# EAGLE board ATTiny-A4950 (EAGLE 6.4)
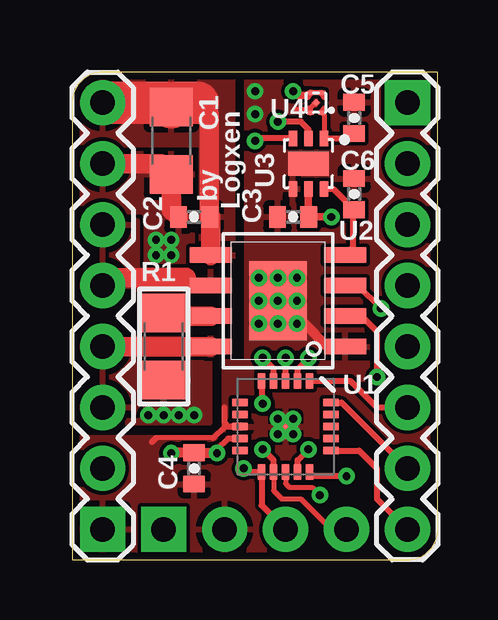
[diagram p0: board, top side]
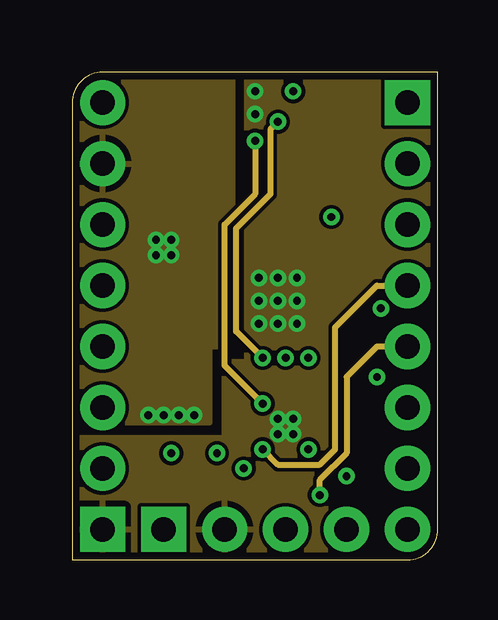
[diagram p1: board, inner layer Route2]
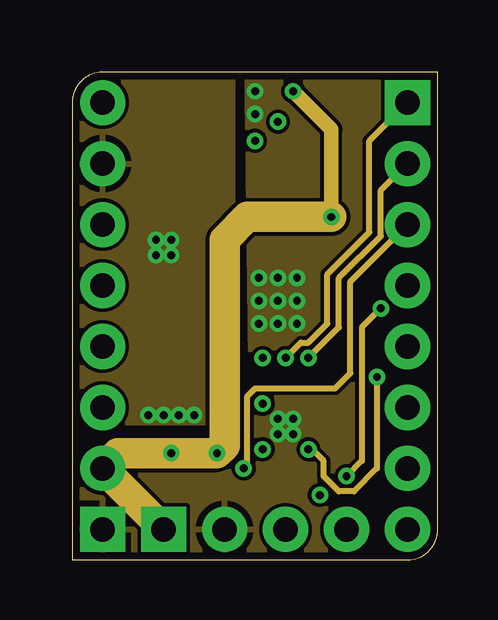
[diagram p2: board, inner layer Route15]
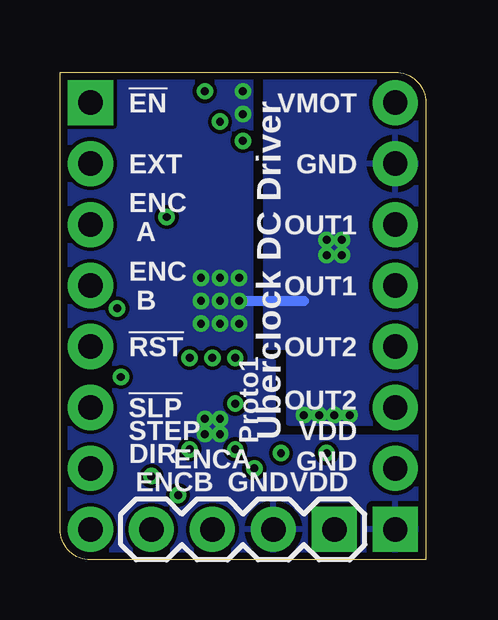
[diagram p3: board, bottom side, seen from below]

Size 15.24 x 20.32 mm. Coordinates in mm from the lower left corner, seen from the top.
Outline: 0,0 13.97,0 arc90 15.24,1.27 15.24,20.32 1.27,20.32 arc90 0,19.05 0,0
Copper layers (1*2*15*16): Top 0.0356mm / dielectric 0.5mm / Route2 0.0356mm / dielectric 0.5mm / Route15 0.0356mm / dielectric 0.5mm / Bottom 0.0356mm
Design rules "LaenPCBOrder *": minimum track width 6mil, minimum drill 13mil, track to track 6mil, track to pad 6mil, pad to pad 6mil, via to via 6mil, smd to smd 6mil, copper to edge 12mil, drill to drill 6mil, minimum pad ring 7mil, minimum via ring 7mil, stop-mask expansion 4mil, vias tented up to drill 13mil, thermal gap 10mil

## Footprints (pad centres in the part's own frame; a part is rotated, then mirrored left to right if it is on the bottom)
1206 = smd 1.6 x 1.8: 1 -1.4,0; 2 1.4,0
0402-CAP = smd 0.7 x 0.9: 1 -0.65,0; 2 0.65,0
1X08 = drill 1.016 pad 1.88 square: 1 0,0 | drill 1.016 pad 1.88: 2 2.54,0; 3 5.08,0; 4 7.62,0; 5 10.16,0; 6 12.7,0; 7 15.24,0; 8 17.78,0
1X04 = drill 1.016 pad 1.88 square: 1 0,0 | drill 1.016 pad 1.88: 2 2.54,0; 3 5.08,0; 4 7.62,0
QFN20 = smd 1 x 1: 0 0,0 | smd 0.65 x 0.3: 1 -1.9,1; 2 -1.9,0.5; 3 -1.9,0; 4 -1.9,-0.5; 5 -1.9,-1; 11 1.9,-1; 12 1.9,-0.5; 13 1.9,0; 14 1.9,0.5; 15 1.9,1 | smd 0.3 x 0.65: 6 -1,-1.9; 7 -0.5,-1.9; 8 0,-1.9; 9 0.5,-1.9; 10 1,-1.9; 16 1,1.9; 17 0.5,1.9; 18 0,1.9; 19 -0.5,1.9; 20 -1,1.9
SOICN8-PAD = smd 0.65 x 1.75: 1 -1.905,-2.8; 2 -0.635,-2.8; 3 0.635,-2.8; 4 1.905,-2.8; 5 1.905,2.8; 6 0.635,2.8; 7 -0.635,2.8; 8 -1.905,2.8 | smd 3.3 x 2.41: PAD 0,0
6DFN = smd 0.35 x 0.65: 1 -0.65,-1.05; 2 0,-1.05; 3 0.65,-1.05; 4 0.65,1.05; 5 0,1.05; 6 -0.65,1.05 | smd 1.7 x 1: PAD 0,0
XDFN4 = smd 0.27 x 0.17: 1 -0.24,0.415; 2 0.24,0.415; 3 0.24,-0.415; 4 -0.24,-0.415 | smd 0.22 x 0.22 rotated 45: TAB 0,0

## Placement (x,y rotation side)
C1  4.7uF  [1206]  4.13,17.46 270 top
C2  0.22uF X5R  [0402-CAP]  5.08,14.29 180 top
C3  0.1uF  [0402-CAP]  9.21,14.29 0 top
C4  0.1uF  [0402-CAP]  5.08,3.81 270 top
C5  0.1uF  [0402-CAP]  11.75,18.41 90 top
C6  0.1uF  [0402-CAP]  11.75,15.24 90 top
JP1  [1X08]  13.97,19.05 270 top
JP2  [1X08]  1.27,1.27 90 top
JP3  Encoder  [1X04]  3.81,1.27 180 bottom
R1  R050 1W  [1206]  3.81,8.89 90 top
U1  ATTINY84A-MU  [QFN20]  8.89,5.56 270 top
U2  A4950  [SOICN8-PAD]  8.57,10.79 90 top
U3  MCP4706  [6DFN]  9.84,16.51 180 top
U4  NCP4680  [XDFN4]  10.16,19.05 180 top

## Library data of the parts
C1-C6 = SparkFun-Capacitors
JP1-JP3 = SparkFun-Connectors
R1 = microbuilder
U1 = SparkFun-DigitalIC
U2-U4 = logxen

## Nets
!EN!: JP1.1 U1.3
!RST!: JP1.5 U1.13
!SLP!: JP1.6 U1.1
D0_IN1: U1.15 U2.3
D0_IN2: U1.14 U2.2
D0_LSS: R1.2 U2.7
D0_OUT1: JP2.5 JP2.6 U2.6
D0_OUT2: JP2.3 JP2.4 U2.8
DAC_REF: C5.1 U3.1 U4.1
DAC_SCL: U1.4 U3.2
DAC_SDA: U1.5 U3.3
DIR: JP1.8 U1.16
ENC0: JP1.3 JP3.3 U1.11
ENC1: JP1.4 JP3.4 U1.12
EXT: JP1.2 U1.2
GND: C1.2 C2.2 C3.1 C4.2 C5.2 C6.2 JP2.1 JP2.7 JP3.2 R1.1 U1.0 U1.8 U2.1 U2.PAD U3.4 U3.PAD U4.2 U4.TAB
STEP: JP1.7 U1.20
VDD: C3.2 C4.1 JP2.2 JP3.1 U1.9 U3.5 U4.3 U4.4
VMOT: C1.1 C2.1 JP2.8 U2.5
VREF: C6.1 U2.4 U3.6

## Tracks (layer width: path | path; a pad name or v marks a point on that pad's centre or on a via)
!EN!  (via drill 0.33)
  Top 0.254: U1.3 v8.89,8.41
  Route15 0.254: v8.89,8.41 9.53,9.05 9.84,9.05 10.64,9.84 10.64,11.91 12.38,13.65 12.38,17.46 JP1.1
!RST!  (via drill 0.33)
  Top 0.203: U1.13 8.89,3.17 9.05,3.02 10,3.02 v10.32,2.7
  Route2 0.254: JP1.5 12.7,8.89 11.43,7.62 11.43,4.45 10.32,3.33 v10.32,2.7
!SLP!
  Top 0.254: U1.1 11.59,7.46 12.7,6.35 JP1.6
D0_IN1  (via drill 0.33)
  Top 0.254: U2.3 11.91,11.43 v12.86,10.48 | v11.43,3.49 10.05,3.49 U1.15
  Route15 0.254: v12.86,10.48 12.06,9.68 12.06,4.13 v11.43,3.49
D0_IN2  (via drill 0.33)
  Top 0.254: U2.2 12.06,10.16 12.7,9.53 v12.7,7.62 | U1.14 9.39,4.15 v9.84,4.6
  Route15 0.254: v12.7,7.62 12.7,3.81 11.75,2.86 11.11,2.86 10.48,3.49 10.48,4.13 10,4.6 v9.84,4.6
D0_LSS
  Top 0.813: U2.7 3.94,10.16 R1.2
D0_OUT1
  Top 0.61: U2.6 5.08,11.43 4.76,11.75
  Top 0.813: 4.76,11.75 1.59,11.75 JP2.5
  pour Top (isolate 0.127, rank 2): -1.27,14.13 2.7,14.13 2.7,12.06 6.35,12.06 6.35,11.27 -1.27,11.27
D0_OUT2
  Top 0.813: U2.8 JP2.4
  pour Top (rank 2): -1.27,6.19 2.7,6.19 2.7,8.57 6.35,8.57 6.35,9.21 -1.27,9.21
DAC_REF
  Top 0.203: U4.1 10.49,18.54 U3.1
  Top 0.254: U3.1 11.54,17.56 C5.1
DAC_SCL  (via drill 0.33)
  Top 0.254: U1.4 8.39,7.96 v7.94,8.41 | U3.2 9.84,17.94 9.53,18.26 v8.57,18.26
  Route2 0.254: v8.57,18.26 8.26,17.94 8.26,15.24 6.83,13.81 6.83,9.53 v7.94,8.41
DAC_SDA  (via drill 0.33)
  Top 0.254: U1.5 7.89,6.56 v7.94,6.51 | U3.3 7.72,17.56 v7.62,17.46
  Route2 0.254: v7.62,17.46 7.62,15.24 6.35,13.97 6.35,8.1 v7.94,6.51
DIR
  Top 0.254: U1.16 11.95,4.56 12.7,3.81 12.7,2.54 JP1.8
ENC0  (via drill 0.33)
  Top 0.254: JP3.3 7.89,2.27 U1.11 7.3,3.66 v7.14,3.81
  Route15 0.254: v7.14,3.81 7.3,3.97 7.3,6.83 7.62,7.14 10.95,7.14 11.59,7.78 11.59,11.59 JP1.3
ENC1  (via drill 0.33)
  Top 0.203: U1.12 8.39,2.88 8.73,2.54 9.53,2.54 10.79,1.27 JP3.4
  Top 0.254: U1.12 8.39,4.15 v7.94,4.6
  Route2 0.254: v7.94,4.6 8.57,3.97 10.32,3.97 10.95,4.6 10.95,9.68 12.7,11.43 JP1.4
EXT  (via drill 0.33)
  Top 0.254: U1.2 9.39,7.96 v9.84,8.41
  Route15 0.254: v9.84,8.41 11.11,9.68 11.11,11.75 12.86,13.49 12.86,15.4 JP1.2
GND  (via drill 0.33)
  Top 0.203: 5.87,5.08 3.49,5.08 | U4.TAB 9.92,18.81 U4.2
  Top 0.254: U4.2 9.92,18.66 9.84,18.73 9.37,18.73 | 6.51,5.56 6.35,5.71 6.35,6.35 | U1.8 6.51,5.56 | 6.51,5.56 6.35,5.56 5.87,5.08 | 3.49,5.08 3.33,4.92
  Top 0.406: U2.1 10.64,8.89 9.68,9.84 v9.37,9.84
  Top 0.813: JP2.7 3.68,16.51 C1.2 4.13,14.59 C2.2
  Bottom 0.406: v7.78,10.79 5.08,10.79
  other vias: 3.81,6.03 4.45,6.03 5.08,6.03 9.21,5.87 8.57,5.87 8.57,5.24 9.21,5.24 8.57,10.79 9.37,10.79 9.37,11.75 8.57,11.75 7.78,11.75 7.78,9.84 8.57,9.84 3.49,13.34 3.49,12.7 4.13,12.7 3.17,6.03 7.62,18.57 7.62,19.53 4.13,13.34
  pour Top (rank 5): 0,20.32 6.67,20.32 6.67,8.89 5.71,8.89 5.71,5.71 0,5.71
  pour Route2 (rank 5): -0.32,20.64 6.67,20.64 6.67,8.89 5.71,8.89 5.71,5.71 -0.32,5.71
  pour Route2 (rank 6): 7.3,20.64 15.56,20.64 15.56,-0.32 -0.32,-0.32 -0.32,5.08 6.35,5.08 6.35,8.26 7.3,8.26
  pour Top (rank 6): 7.3,20.32 15.24,20.32 15.24,0 0,0 0,5.08 6.35,5.08 6.35,8.26 7.3,8.26
  pour Route15 (rank 5): -0.64,20.95 6.67,20.95 6.67,5.71 -0.64,5.71
  pour Route15 (rank 6): 7.3,20.95 15.88,20.95 15.88,-0.64 -0.64,-0.64 -0.64,5.08 6.35,5.08 6.35,8.26 7.46,8.26
  pour Bottom (rank 5): -0.95,21.27 6.67,21.27 6.67,8.89 5.71,8.89 5.71,5.71 -0.95,5.71
  pour Bottom (rank 6): 7.3,21.27 16.19,21.27 16.19,-0.95 -0.95,-0.95 -0.95,5.08 6.35,5.08 6.35,8.26 7.3,8.26
STEP
  Top 0.254: U1.20 11.22,6.56 JP1.7
VDD  (via drill 0.33)
  Top 0.203: U4.4 U4.3
  Top 0.254: 9.82,19.37 U4.3 | U1.9 6.49,5.06 6.03,4.6 v6.03,4.45
  Top 0.305: v10.79,14.29 C3.2 9.84,14.3 U3.5 | v9.21,19.53 9.37,19.37 9.82,19.37
  Top 0.406: v4.13,4.45 4.11,4.46 C4.1 6.05,4.46 v6.03,4.45
  Route15 0.61: v10.79,14.29 10.79,17.94 v9.21,19.53
  Route15 1.27: JP3.1 JP2.2 1.91,4.45 v4.13,4.45 v6.03,4.45 6.35,4.76 6.35,13.34 7.3,14.29 v10.79,14.29
VMOT
  Top 0.813: C2.1 5.77,14.29 | 3.94,19.05 C1.1 | C2.1 5.71,14.3 5.71,18.57 5.24,19.05 | U2.5 5.77,14.24 C2.1
  Top 1.778: JP2.8 3.94,19.05 | C1.1 4.32,19.05 5.24,19.05
  pour Top: -1.27,21.59 6.67,21.59 6.67,12.38 5.4,12.38 5.4,17.3 -1.27,17.3
VREF
  Top 0.254: U3.6 10.88,15.46 C6.1 11.69,14.53 11.69,13.02 U2.4

## Text on the board
tPlace: by | Logxen
bPlace: VMOT | !EN! | GND | EXT | OUT1 | ENC / A | Uberclock DC Driver | OUT1 | ENC / B | OUT2 | !RST! | OUT2 | Proto1 | !SLP! | VDD | STEP | GND | ENCA | DIR | VDD | GND | ENCB